# Altium PCB MDBU020.PcbDoc (part 2 of 2)
Units mil, origin at the board's own origin, x right, y up, seen from the top; angles counter-clockwise.
Board outline 2200 x 2400 mil, 4 copper layers (Top Layer, Signal Layer 1, Signal Layer 2, Bottom Layer), stack 62.8 mil thick; 105 components, 60 nets, 366 pads, 286 vias.
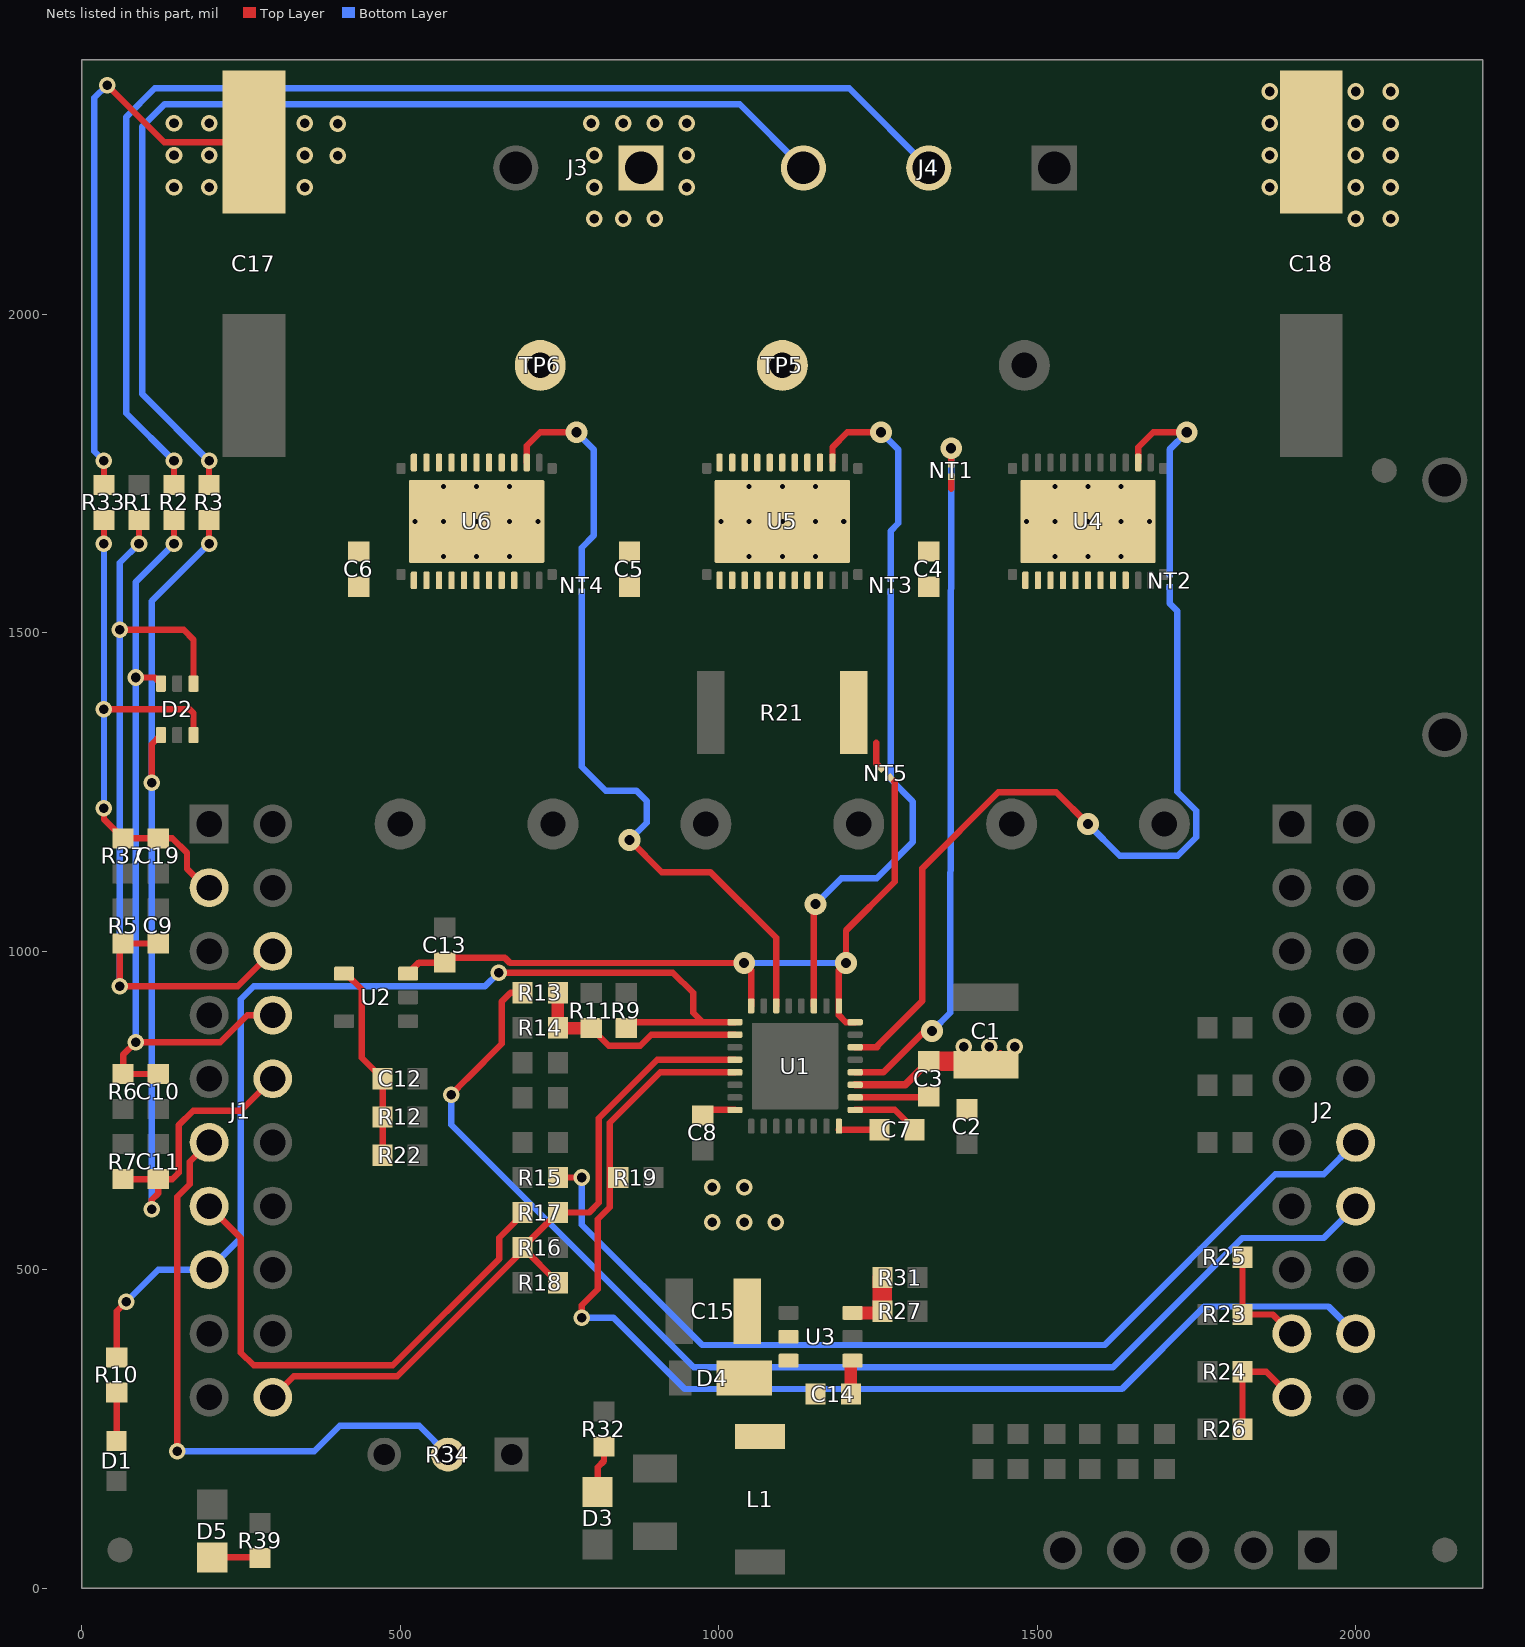
[diagram p4: the nets of this part, all layers, seen from the top]

## Via types
v1: diameter 26, hole 15, Top Layer to Bottom Layer, tented both sides, 231 vias
v2: diameter 19.68, hole 7.87, Top Layer to Bottom Layer, 38 vias
v3: diameter 34, hole 16, Top Layer to Bottom Layer, tented both sides, 17 vias

## Nets (pads, with @x,y where several pads share a name; then routed paths per layer and width w, separated by ;. In a path a pad name is that pad's centre, name@x,y a point inside that pad or via, vN(x,y) a via of type N, cw(c..) or ccw(c..) an arc to the next point about the centre after c; other vN are vias at no path point) (continued)
MOTB: J4.2 R2.2 TP5.1 U5.3 U5.4 U5.5 U5.6 U5.7 U5.8 U5.9 U5.10 U5.11 | length 1938.9
  Top Layer w10: R2.2@145,1732.56 v1(145,1770)
  Bottom Layer w10: v1(145,1770) 70,1845 70,2310 115,2355 1205,2355 J4.2@1330,2230
MOTC: J4.3 R3.2 TP6.1 U6.3 U6.4 U6.5 U6.6 U6.7 U6.8 U6.9 U6.10 U6.11 | length 1700
  Top Layer w10: R3.2@200,1732.56 v1(200,1770)
  Bottom Layer w10: v1(200,1770) 95,1875 95,2295 130,2330 1033.15,2330 J4.3@1133.15,2230
NetC3_2: C3.2 U1.2 | length 118
  Top Layer w10: U1.2@1214.49,770.79 C3.2@1332.44,770.79
NetC7_1: C7.1 U1.1 | length 106
  Top Layer w10: U1.1@1214.49,751.1 1276.46,751.1 C7.1@1307.56,720
NetC7_2: C7.2 U1.32 | length 63.5
  Top Layer w10: U1.32@1188.9,720 C7.2@1252.44,720
NetC8_1: C8.1 U1.24 | length 42
  Top Layer w10: C8.1@983.54,751.1 U1.24@1025.51,751.1
NetC12_2: C12.2 R12.2 R22.2 U2.4 | length 312
  Top Layer w10: U2.4@412,965.2 414.8,965.2 439.65,940.35 439.65,905.15 439.75,905.05 439.75,875.64 439.65,875.54 439.65,832.79 C12.2@472.44,800 R12.2@472.44,740 R22.2@472.44,680
NetC14_1: C14.1 U3.1 | length 50
  Top Layer w20: C14.1@1207.56,305 U3.1@1207.56,354.96
NetC14_2: C14.2 D4.1 L1.1 U3.6 | length 17.8
  Top Layer w10: L1.1@1065,245 L1.1@1077.56,232.44
NetD1_1: D1.1 R10.2 | length 75.9
  Top Layer w10: D1.1@55,231.5 R10.2@55,307.44
NetD3_2: D3.2 R32.2 | length 75.2
  Top Layer w10: D3.2@810,151.34 810,190 820,200 R32.2@820,222.44
NetD5_2: D5.2 R39.2 | length 75.5
  Top Layer w10: D5.2@205,48.66 278.78,48.66 R39.2@280,47.44
NetJ2_17: J2.17 R23.1 R25.2 | length 179.9
  Top Layer w10: R25.2@1822.56,520 R23.1@1822.56,430 1870,430 J2.17@1900,400
NetJ2_19: J2.19 R24.1 R26.2 | length 184
  Top Layer w10: R26.2@1822.56,250 R24.1@1822.56,340 1860,340 J2.19@1900,300
NetNT2_1: NT2.1 U4.2 | length 344.1
  Top Layer w10: U4.2@1658.74,1767.52 1658.74,1791.53 1682.21,1815 v3(1735,1815)
  Bottom Layer w10: NT2.1@1708,1592.09 1708,1788 v3(1735,1815)
NetNT3_1: NT3.1 U5.2 | length 356.1
  Top Layer w10: U5.2@1178.74,1767.52 1178.74,1791.53 1202.21,1815 v3(1255,1815)
  Bottom Layer w10: v3(1255,1815) 1282,1788 1282,1672.03 1270,1660.03 NT3.1@1270,1585
NetNT4_1: NT4.1 U6.2 | length 356.3
  Top Layer w10: U6.2@698.74,1767.52 698.74,1793.68 720.06,1815 v3(777,1815)
  Bottom Layer w10: v3(777,1815) 804,1788 804,1652.95 785,1633.95 785,1591
NetR11_1: R11.1 R13.1 R14.1 U1.18 | length 351.9
  Top Layer w10: R14.1@747.56,880 R14.1@748.12,879.44 ; R11.1@800,879.44 827.75,851.69 876.7,851.69 894.22,869.21 U1.18@1025.51,869.21
  Top Layer w20: R14.1@747.56,880 R13.1@747.56,935 ; R14.1@748.12,879.44 R11.1@800,879.44
NetR27_1: R27.1 R31.2 U3.3 | length 92.3
  Top Layer w10: R27.1@1244.84,432.4 R27.1@1247.44,435
  Top Layer w20: U3.3@1210.2,432.4 R27.1@1244.84,432.4
  Top Layer w30: R27.1@1256.95,434 R31.2@1256.95,488
NFAULT: J1.15 R9.1 R10.1 U1.17 | length 1643.9
  Top Layer w10: R10.1@55,362.56 55,435 v1(70,450) ; v1(655,966.73) 928.27,966.73 960,935 960,903.9 975,888.9 ; R9.1@864.46,888.9 975,888.9 ; U1.17@1025.51,888.9 975,888.9
  Bottom Layer w10: v1(70,450) 120,500 J1.15@200,500 250,550 250,925 270,945 633.27,945 v1(655,966.73)
NSCS/GAIN: J2.18 R19.2 U1.21 | length 1886.1
  Top Layer w10: v1(785,425) 785,444.64 810,469.64 810,579.31 829.02,598.33 829.02,730.94 908.24,810.16 U1.21@1025.51,810.16
  Bottom Layer w10: v1(785,425) 834.88,425 946.88,313 1633.21,313 1762.72,442.51 1957.49,442.51 J2.18@2000,400
POT: J1.11 R34.2 | length 965.9
  Top Layer w10: v1(150,215) 150,615 169.5,634.5 169.5,669.5 J1.11@200,700
  Bottom Layer w10: v1(150,215) 365,215 405,255 530,255 R34.2@575,210
SCLK: J1.13 R17.2 | length 822
  Top Layer w10: J1.13@200,600 250,550 250,370 270,350 488.52,350 655.54,517.02 655.54,550.54 692.44,587.44 R17.2@692.44,590
SDI: J2.12 R15.2 | length 1536.4
  Top Layer w10: R15.2@747.56,645 v1(785,645)
  Bottom Layer w10: v1(785,645) 785,571.05 974.05,382 1606.04,382 1874.04,650 1950,650 J2.12@2000,700
SDO: J2.14 R13.2 | length 1948.6
  Top Layer w10: v1(580,775) 580,775.36 604.64,800 605,800 659.78,854.78 659.78,921.41 673.38,935 R13.2@692.44,935 R13.2@692.44,934.02
  Bottom Layer w10: v1(580,775) 580,727.97 960.97,347 1619.12,347 1822.12,550 1950,550 J2.14@2000,600
SHA: NT2.2 U1.6 | length 1288.2
  Top Layer w10: U1.6@1214.49,849.53 1248.85,849.53 1248.85,851.52 1320,922.67 1320,1130.71 1439.29,1250 1530,1250 v3(1580,1200)
  Bottom Layer w10: v3(1580,1200) 1630,1150 1720.71,1150 1750,1179.29 1750,1220.71 1720,1250.71 1720,1534.47 1708,1546.47 NT2.2@1708,1572.09
SHB: NT3.2 U1.11 | length 758
  Top Layer w10: U1.11@1149.53,914.49 v3@1149.53,1071.53
  Bottom Layer w10: v3(1152.18,1074.18) 1192.82,1114.82 1248.1,1114.82 1305,1171.72 1305,1235.21 1270,1270.21 NT3.2@1270,1565
SHC: NT4.2 U1.14 | length 866.6
  Top Layer w10: v3(860,1175) 910.61,1124.39 987.32,1124.39 1090.47,1021.24 U1.14@1090.47,914.49
  Bottom Layer w10: 785,1559 785,1290 823,1252 871.18,1252 887,1236.18 887,1202 v3(860,1175)
SL: C13.1 NT5.2 U1.8 U1.9 U1.16 U2.3 | length 1213.4
  Top Layer w10: U2.3@512.4,965.2 529.64,982.44 C13.1@570,982.44 570,989.73 664.53,989.73 672.53,981.73 v3(1040,981.73) 1051.1,970.63 U1.16@1051.1,914.49 ; U1.8@1214.49,888.9 1199.88,888.9 1188.9,899.88 U1.9@1188.9,914.49 1188.9,970.63 v3(1200,981.73) 1200,1032.79 1276.39,1109.18 1276.39,1266.11 1273.81,1268.69
  Bottom Layer w10: v3(1040,981.73) v3(1200,981.73)
SP: C4.2 C5.2 C6.2 NT5.1 R21.2 U4.12 U4.13 U4.14 U4.15 U4.16 U4.17 U4.18 U4.19 U4.20 U5.12 U5.13 U5.14 U5.15 U5.16 U5.17 U5.18 U5.19 U5.20 U6.12 U6.13 U6.14 U6.15 U6.16 U6.17 U6.18 U6.19 U6.20 | length 43.7
  Top Layer w10: 1247.5,1327.5 1247.5,1295 NT5.1@1255.43,1287.07
VDRAIN: NT1.1 U1.4 | length 1099.3
  Top Layer w10: U1.4@1214.49,810.16 1258.98,810.16 1323.82,875 v3(1335,875) ; NT1.1@1365,1765 v3(1365,1790)
  Bottom Layer w10: v3(1335,875) 1363.81,903.81 v3(1365,1790)
VDS: J1.20 R16.1 R17.1 R18.2 U1.20 | length 1098.4
  Top Layer w10: J1.20@300,300 333,333 495.56,333 R16.1@692.44,529.88 ; R18.2@747.56,480 747.44,480 R16.1@692.44,535 692.56,535 R17.1@747.56,590 796.65,590 812.02,605.37 812.02,737.98 903.88,829.84 U1.20@1025.51,829.84
VM: C1.1 C2.1 C3.1 C4.1 C5.1 C6.1 C15.1 C17.1 C18.1 J3.1 NT1.2 R33.2 U1.3 U3.5 U4.27 U5.27 U6.27 | length 1146.9
  Top Layer w10: R33.2@35,1732.56 v1(35,1770) ; v1(40,2360) 129.54,2270.46 C17.1@270.49,2270.46 ; 1365,1726.19 NT1.2@1365,1745 ; C1.1@1440,837.56 C1.1@1442.44,840
  Top Layer w12: U1.3@1214.49,790.47 1292.91,790.47 C3.1@1330,827.56
  Top Layer w30: C3.1@1330,827.56 C1.1@1414.29,827.56
  Bottom Layer w10: v1(35,1770) 20,1785 20,2340 v1(40,2360)
  other v1: 990,575 1040,575 1090,575 990,630 1040,630 1385,850 1425,850 1465,850 805,2150 850,2150 900,2150 2000,2150 2055,2150 145,2200 200,2200 350,2200 805,2200 950,2200 1865,2200 2000,2200 2055,2200 402.2,2249.26 145,2250 200,2250 350,2250 805,2250 950,2250 1865,2250 2000,2250 2055,2250 402.2,2299.26 145,2300 200,2300 350,2300 800,2300 850,2300 900,2300 950,2300 1865,2300 2000,2300 2055,2300 1865,2350 2000,2350 2055,2350
  other v2: 568.03,1619.88 620,1619.88 671.97,1619.88 1048.03,1619.88 1100,1619.88 1151.97,1619.88 1528.03,1619.88 1580,1619.88 1631.97,1619.88 523.54,1675 568.03,1675 620,1675 671.97,1675 716.46,1675 1003.54,1675 1048.03,1675 1100,1675 1151.97,1675 1196.46,1675 1483.54,1675 1528.03,1675 1580,1675 1631.97,1675 1676.46,1675 568.03,1730.12 620,1730.12 671.97,1730.12 1048.03,1730.12 1100,1730.12 1151.97,1730.12 1528.03,1730.12 1580,1730.12 1631.97,1730.12
VSENA: C9.1 D2.1 J1.6 R1.1 R5.2 | length 1335.8
  Top Layer w10: v1(60,1505) 160,1505 175.59,1489.41 D2.1@175.59,1420.35 ; v1(90,1640) R1.1@90,1677.44 ; C9.1@127.44,1012.44 R5.2@65,1012.44 62.44,1015 60,1012.56 v1(60,945) 245,945 J1.6@300,1000
  Bottom Layer w10: v1(60,945) v1(60,1505) 60,1610 v1(90,1640)
VSENB: C10.1 D2.3 J1.8 R2.1 R6.2 | length 1234
  Top Layer w10: v1(85,1430) 114.76,1430 D2.3@124.41,1420.35 ; C10.1@120,807.56 R6.2@65,807.56 65,837.49 v1(85,857.49) 217.61,857.49 260.12,900 J1.8@300,900 ; v1(145,1640) R2.1@145,1677.44
  Bottom Layer w10: v1(85,857.49) v1(85,1430) 85,1580 v1(145,1640)
VSENC: C11.1 D2.4 J1.10 R3.1 R7.2 | length 1599.8
  Top Layer w10: R7.2@65,642.44 C11.1@120,642.44 ; v1(110,595) 110,610 120,620 C11.1@120,642.44 ; v1@112.6,1267.6 v1(110,1265) 110,1325.24 D2.4@124.41,1339.65 ; v1(200,1640) R3.1@200,1677.44 ; J1.10@300,800 250,750 175,750 152.5,727.5 152.5,652.5 142.44,642.44 C11.1@120,642.44
  Bottom Layer w10: v1(110,595) v1(110,1265) 110,1550 v1(200,1640)
VSENVM: C19.1 D2.6 J1.3 R33.1 R37.2 | length 873.5
  Top Layer w10: v1(35,1225) 35,1207.56 R37.2@65,1177.56 142.44,1177.56 165.39,1154.61 165.39,1129.73 197.56,1097.56 J1.3@200,1100 ; v1(35,1380) 169.69,1380 175.59,1374.09 D2.6@175.59,1339.65 ; v1(35,1640) R33.1@35,1677.44
  Bottom Layer w10: v1(35,1225) v1(35,1380) v1(35,1640)
pads on no net: FID1.1 FID2.1 FID3.1 J1.2 J1.5 J1.7 J1.12 J1.14 J1.17 J1.19 J2.8 J2.10 J2.20 U1. U3.4 U4. U4.21 U4.23 U4.24 U4.25 U4.26 U5. U5.21 U5.23 U5.24 U5.25 U5.26 U6. U6.21 U6.23 U6.24 U6.25 U6.26

## Polygon pours and split planes (outlines as drawn)
VM on Top Layer "Top Layer-No Net 1" (solid, pour order 0): 400,1610 1850,1610 1850,1740 400,1740
NetC14_2 on Top Layer "NetC14_2" (solid, remove dead copper, pour order 5): 1025,220 1026.5,221.5 1026.5,352.69 1157.31,352.69 1160,350 1160,220 1025,220
VM on Top Layer "Top Layer-VM" (solid, remove dead copper, pour order 7): 1485,870 1485,735 1365,735 1365,870
VM on Top Layer "Top Layer-VM" (solid, remove dead copper, pour order 9): 952.6,650 1057.49,650 1132.49,575 1132.49,375.71 953.31,375.71 953.31,443.87 953.31,582.76 952.6,583.47 952.6,697.24
MOTB on Top Layer "MOTB" (solid, pour order 2): 810,1675 1420,1675 1420,2180 1420,2380 1230,2380 1230,2200 1020,1935
MOTA on Top Layer "MOTA" (solid, pour order 3): 1435,2380 1435,2210 1435,2170 1415,2150 1415,1675 1830,1675 1830,2380
MOTC on Top Layer "MOTC" (solid, pour order 1): 400,1675 820.39,1675 1215,2180 1215,2380 1020,2380 1020,2215 905,2100 530,2100 400,2000
VM on Top Layer "VM_TOP" (solid, pour order 4): 20,2380 1000,2380 1000,2225 895,2120 790,2120 790,2260 735,2315 640,2315 480,2315 320,2155 20,2155
GND on Top Layer "GND_TOP" (solid, pour order 12): 770,2250 770,2120 635,2120 520,2120 445,2045 410,2010 410,1890 410,1795 210,1795 20,1795 20,2135 335,2135 495,2295 725,2295
VM on Top Layer "VM_TOP2" (solid, pour order 8): 1850,2380 2180,2380 2180,2180 2180,2090 1850,2090
GND on Top Layer "GND_TOP2" (solid, pour order 11): 1850,2070 2180,2070 2180,1900 2180,1700 1850,1700
3.3V on Top Layer "Top Layer-VM" (solid, remove dead copper, pour order 10): 1251.69,443.97 1252.4,444.68 1309.34,444.68 1431.58,444.68 1431.58,322.44 1431.58,100 1585,100 1585,15 785,15 785,135 1251.63,135 1252.4,330.2 1251.69,330.91 1251.69,444.68
SP on Top Layer "SP_TOP" (solid, pour order 6): 400,1420 800,1420 900,1456.71 1095,1456.71 1095,1309.06 1250,1309.06 1390,1309.06 1640,1482.95 1850.44,1482.95 1850.44,1612.95 400,1612.95
GND on Top Layer "Top Layer-No Net" (solid, remove dead copper, pour order 18): 0,0 2200,0 2200,2400 0,2400 0,0
VM on Bottom Layer "BOTTOM_VM" (solid, remove dead copper, pour order 15): 0,2400 2200,2400 2200,1475 0,1475
GND on Bottom Layer "Bottom Layer-GND" (solid, remove dead copper, pour order 17): 5.32,2400.26 2205.32,2400.26 2205.32,0.26 5.32,0.26 5.32,2400.26
3.3V on Signal Layer 2 "3.3V_PLANE" (solid, remove dead copper, pour order 16): 5,1290 910,1290 910,500 1310,500 1425,610 1605,790 1605,1290 2205,1290 2205,5 5,5
VM on Signal Layer 2 "VM_PLANE" (solid, remove dead copper, pour order 14): 0,2400 2200,2400 2200,1300 1590,1300 1590,800 1427,637 1305,515 910,515 910,1300 0,1300
GND on Signal Layer 1 "GND_PLANE" (solid, remove dead copper, pour order 13): -2.82,2396.23 2197.18,2396.23 2197.18,-3.77 -2.82,-3.77

## Keep-outs
Keep-Out Layer:
  lines w10: 0,0 2200,0 ; 0,0 0,2400 ; 0,0 2200,0 ; 0,0 0,2400 ; 0,2400 2200,2400 ; 0,2400 2200,2400 ; 2200,0 2200,2400 ; 2200,0 2200,2400
  text ".Layer_Name" at 577,-858.49 h60

## Other copper
Top Layer:
  text ".Layer_Name" at 577,-858.49 h60
Bottom Layer:
  rectangle net GND: 182.48,1829 375,2042.52
  rectangle net GND: 1770,1435 2179.61,2025
  rectangle net GND: 530.33,2121.76 772.62,2308.47
  text ".Layer_Name" at 577,-858.49 h60

## Silkscreen, mask and mechanical layers (free items; w line width, h text height)
Top Overlay:
  lines w10: 340,1800 340,1285 340,1280 440,1280 2085,1280 2085,1715 ; 940,655 1545,655 1545,975 940,975 940,655
  text "GND-" at 565,1975 h70
  text "VM+" at 865,1975 h70
  text "C" at 1135,1975 h70
  text "B" at 1325,1975 h70
  text "A" at 1520,1975 h70
  text "MOTC" at 790,1880 h50
  text "MOTB" at 1175,1880 h50
  text "MOTA" at 1530,1850 h50
  text "GND" at 2160.67,1475 h70 r90
  text "Hot Surface" at 895,1465 h80
  text "GHC" at 430,1085 h70
  text "GLC" at 685,1085 h70
  text "GHB" at 915,1085 h70
  text "GLB" at 1160,1085 h70
  text "GHA" at 1400,1085 h70
  text "GLA" at 1642.28,1085 h70
  text "DRV8320X" at 935,990 h70
  text "'.PRJ_Number' .PCB_Rev" at 2170,875 h65 r90
  text "STATUS" at 155,170 h50
  text "BOOSTXL-DRV8320XEVM" at 2170,140 h65 r90
  text "+" at 1525,120 h60
  text "A" at 1625,120 h65
  text "B" at 1725,120 h65
  text "C" at 1825,120 h65
  text "-" at 1925,120 h60
  text "FLT" at 25,110 h50
  text "HALL" at 1325,40 h60
  text ".Layer_Name" at 577,-858.49 h60
Bottom Overlay:
  drawing of 3493 lines, arcs and shapes, not listed
  text ".Layer_Name" at 577,-858.49 h60
Top Paste:
  text ".Layer_Name" at 577,-858.49 h60
Bottom Paste:
  text ".Layer_Name" at 577,-858.49 h60
Top Solder:
  text ".Layer_Name" at 577,-858.49 h60
  text ".Layer_Name" at 577,-858.49 h60
Bottom Solder:
  text ".Layer_Name" at 577,-858.49 h60
Drill Guide:
  text ".Layer_Name" at 577,-858.49 h60
M1 Board Outline:
  the board outline again, w10
  text ".Layer_Name" at 577,-858.49 h60
M2 Board Dimensions:
  rectangle: 125,-400 500,-275
  rectangle: 0,-275 125,-150
  lines w7: 0,-275 1000,-275 ; 125,-400 125,-150 ; 250,-400 250,-150 ; 500,-400 500,-150 ; 750,-400 750,-150 ; 0,-400 0,-150 1000,-150 1000,-400 0,-400
  text ".Layer_Name" at 577,-858.49 h60
M3 3D STEP Top:
  text ".Layer_Name" at 577,-858.49 h60
M4 3D STEP Bottom:
  text ".Layer_Name" at 577,-858.49 h60
M5 Assembly Top:
  lines w10: -292,-930.17 6308,-930.17 ; -292,-726.83 6310,-726.83 ; -292,-523.5 -292,-1133.5 3713,-1133.5 6310,-1133.5 6310,-523.5 -291.5,-523.5 -291.5,-1133.5 1284,-1133.5 ; 2173,-1133.5 2173,-523.5 ; 3440,-726.83 3440,-523.5 ; 4280,-726.83 4280,-523.5 ; 4902,-1140 4902,-937.17
  text "COMPONENTS MARKED 'DNP' SHOULD NOT BE POPULATED." at 1153.5,-318.5 h60
  text "ASSEMBLY VARIANT:" at 1153,-434 h60
  text ".VariantName" at 2189,-434 h60
  text "PCB VIEWED FROM TOP SIDE" at -228.5,-655.67 h60
  text "BOARD #:" at 2248,-655.67 h60
  text ".PRJ_Number" at 2793.5,-655.67 h60
  text "REV:" at 3638,-655.67 h60
  text ".PCB_Rev" at 3929.5,-655.67 h60
  text "SVN REV:" at 4476,-655.67 h60
  text ".VersionControl_RevNumber" at 4982,-655.67 h60
  text "TID #:" at 2248,-859 h60
  text ".TID" at 2793.5,-859 h60
  text "PLOT NAME =" at -228.5,-1064.34 h60
  text ".plot_File_Name" at 577,-1064.34 h60
  text "GENERATED    :" at 2250,-1064.34 h60
  text ".Print_Date" at 3119.5,-1064.34 h60
  text ".Print_Time" at 3848.5,-1064.34 h60
  text "TEXAS INSTRUMENTS" at 5113,-1064.34 h60
M6 Assembly Bottom:
  lines w10: -292.5,-727.33 6309.5,-727.33 ; -290.5,-930.67 6309.5,-930.67 ; 1115.5,-1140.5 1115.5,-937.67 ; 1737.5,-727.33 1737.5,-524 ; 2577.5,-727.33 2577.5,-524 ; 3844.5,-1134 3844.5,-524 ; 4733.5,-1134 6309,-1134 6309,-524 -292.5,-524 -292.5,-1134 2304.5,-1134 6309.5,-1134 6309.5,-524
  text "COMPONENTS MARKED 'DNP' SHOULD NOT BE POPULATED." at 6102,-318 h60
  text ".VariantName" at 5058,-434 h60
  text "ASSEMBLY VARIANT:" at 6097,-434 h60
  text ".VersionControl_RevNumber" at 1035.5,-656.17 h60
  text "SVN REV:" at 1541.5,-656.17 h60
  text ".PCB_Rev" at 2088,-656.17 h60
  text "REV:" at 2379.5,-656.17 h60
  text ".PRJ_Number" at 3224,-656.17 h60
  text "BOARD #:" at 3769.5,-656.17 h60
  text "PCB VIEWED FROM BOTTOM SIDE" at 6246,-656.17 h60
  text ".TID" at 3224,-859.5 h60
  text "TID #:" at 3769.5,-859.5 h60
  text "TEXAS INSTRUMENTS" at 904.5,-1064.84 h60
  text ".Print_Time" at 2169,-1064.84 h60
  text ".Print_Date" at 2898,-1064.84 h60
  text "GENERATED    :" at 3767.5,-1064.84 h60
  text ".plot_File_Name" at 5440.5,-1064.84 h60
  text "PLOT NAME =" at 6246,-1064.84 h60
M9 Title Sheet:
  drawing of 57 lines, arcs and shapes, not listed
  text "1" at 739.84,8036.5 h70
  text "2" at 3235.5,8036.5 h70
  text "3" at 5724.84,8036.5 h70
  text "4" at 8231.51,8036.5 h70
  text "5" at 10730.5,8036.5 h70
  text "6" at 13235.5,8036.5 h70
  text "A" at -416.5,6893.5 h70
  text "A" at 14383.5,6893.5 h70
  text "B" at -416.5,4513.5 h70
  text "B" at 14383.5,4513.5 h70
  text "C" at -416.5,2138.5 h70
  text "C" at 14383.5,2138.5 h70
  text "PROJECT TITLE:" at 11343.5,277.5 h45
  text ".PRJ_Title" at 11393.5,144.17 h70
  text "DESIGNED FOR:" at 11343.5,-23.5 h45
  text ".PRJ_Customer" at 11393.5,-163.5 h70
  text "D" at -416.5,-231.5 h70
  text "D" at 14383.5,-231.5 h70
  text "FILE NAME:" at 11343.5,-323.5 h45
  text ".PCB_File_Name_No_Path" at 11393.5,-443.5 h70
  text "Texas Instruments (TI) and/or its licensors do not warrant the accuracy or completeness of this specification" at 6374,-605.34 h45
  text "ENGINEER:" at 11343.5,-613.5 h45
  text "LAYOUT BY:" at 12848.5,-613.5 h45
  text "or any information contained therein. TI and/or its licensors do not warrant that this design will meet" at 6329.01,-718 h45
  text ".PRJ_Engineer" at 11393.5,-768.49 h70
  text ".PCB_Layout" at 12899,-768.49 h70
  text "the specifications, will be suitable for your application or fit for any particular purpose, or will operate in" at 6329.01,-830.67 h45
  text ".Layer_Name" at 577,-858.49 h60
  text "ALTIUM DESIGNER VERSION:" at 12848.5,-923.5 h45
  text "an implementation. TI and/or its licensors do not warrant that the design is production worthy. You should" at 6329.01,-943.33 h45
  text "completely validate and test your design implementation to confirm the system functionality for your application." at 6374,-1056 h45
  text ".print_Scale" at 11393.5,-1056.83 h70
  text ".Application_BuildNumber" at 12899,-1056.83 h70
  text "1" at 739.84,-1263.5 h70
  text "2" at 3235.5,-1263.5 h70
  text "3" at 5724.84,-1263.5 h70
  text "4" at 8231.51,-1263.5 h70
  text "5" at 10730.5,-1263.5 h70
  text "6" at 13235.5,-1263.5 h70
M10 Fab Notes:
  drawing of 173 lines, arcs and shapes, not listed
  text "DESIGN INFORMATION" at 12378.02,6201 h60
  text "MIN. TRACK WIDTH:" at 11733.46,6021 h60
  text "8" at 12829.7,6021 h60
  text "MIL" at 12984.46,6021 h60
  text "MIN. CLEARANCE:" at 11733.46,5889 h60
  text "0.2" at 12769.7,5889 h60
  text "mm" at 12984.46,5889 h60
  text "MIN. VIA PAD SIZE:" at 11733.46,5757 h60
  text "24" at 12799.71,5757 h60
  text "MIL" at 12984.46,5757 h60
  text "0.05mm (2MIL)" at 12428.46,5615.29 h60
  text "MINIMUM ANNULAR RING" at 11404.23,5611 h60
  text "EXTERNAL" at 13136.46,5611 h60
  text "PER" at 11604.23,5493 h60
  text "IPC-D-275 CLASS 2 LEVEL C" at 11824.23,5493 h60
  text "MIL, HOLES" at 13312.46,5380.71 h60
  text "+/-" at 12920,5380 h60
  text "+/-" at 13774,5380 h60
  text "REGISTRATION TOLERANCES:" at 11404.23,5375 h60
  text "METAL" at 12604,5375 h60
  text "5" at 13180.2,5375 h60
  text "3" at 14013.2,5375 h60
  text "MIL" at 14129.46,5375 h60
  text "+/-" at 13774,5262 h60
  text "HOLE SIZE TOLERANCE (UNLESS OTHERWISE SPECIFIED):" at 11404.23,5257 h60
  text "3" at 14013.2,5257 h60
  text "MIL" at 14129.46,5257 h60
  text "MATERIAL:" at 11329.46,5047.54 h60
  text "FR-4 High Tg" at 12315.9,4907.21 h60
  text "FR-408" at 11750.46,4898.64 h60
  text "OTHER" at 13238.46,4898.64 h60
  text "X" at 12161,4895 h60
  text "62 MIL (1.6mm) +/-10%" at 12070.56,4735.92 h60
  text "THICKNESS:" at 11404.23,4731.64 h60
  text "X" at 11942.4,4731.64 h60
  text "OTHER" at 13355.46,4731.64 h60
  text "TOLERANCE:" at 11404.23,4573.64 h60
  text "X" at 12243.53,4573.64 h60
  text "ANSI IPC-6012 TYPE 3 CLASS 2" at 12430.48,4573.64 h60
  text "OTHER +/-" at 12430.46,4417.64 h60
  text "BOW & TWIST:" at 11404.23,4260.64 h60
  text "X" at 12243.53,4260.64 h60
  text "ANSI IPC-6012 TYPE 3 CLASS 2" at 12430.48,4260.64 h60
  text "OTHER +/-" at 12430.46,4102.13 h60
  text "DRILLING:" at 11329.46,3963.64 h60
  text "REFERENCE:" at 11404.23,3846.64 h60
  text "X" at 12052.46,3846.64 h60
  text "AS SHOWN" at 12239.46,3846.64 h60
  text "X" at 12953.46,3846.64 h60
  text "NC_DRILL FILES" at 13090.46,3846.64 h60
  text "PTH COPPER THICKNESS:" at 11404.23,3688.64 h60
  text "X" at 12534.46,3688.64 h60
  text "20-30 um" at 12671.46,3688.64 h60
  text "OTHER" at 13388.46,3688.64 h60
  text "BOARD FINISH:" at 11329.46,3529.64 h60
  text "SILKSCREEN:" at 11484.68,3411.64 h60
  text "X" at 12433.46,3411.64 h60
  text "TOP" at 12559.46,3411.64 h60
  text "X" at 12943.46,3411.64 h60
  text "BOTTOM" at 13070.46,3411.64 h60
  text "SILKSCREEN COLOR:" at 11484.68,3244.64 h60
  text "X" at 12432.42,3244.64 h60
  text "WHITE" at 12559.46,3244.64 h60
  text "OTHER" at 13070.46,3244.64 h60
  text "X" at 13150,3090 h60
  text "GREEN" at 12690.46,3085.44 h60
  text "OTHER" at 13308.46,3085.44 h60
  text "RED" at 13662,3082 h60
  text "SOLDER RESIST COLOR:" at 11484.68,3074.64 h60
  text "X" at 12563.42,2915.44 h60
  text "MATTE" at 12690.46,2915.44 h60
  text "SEMI-GLOSS" at 13308,2914.8 h60
  text "IMMERSION GOLD (ENIG)" at 12390.46,2726.92 h60
  text "ENEPIG" at 13728,2723.64 h60
  text "SURFACE FINISH:" at 11329.46,2722.64 h60
  text "X" at 12203.51,2722.64 h60
  text "IMM. TIN/SILVER OR EQUIV" at 11659,2565.64 h60
  text "OTHER" at 13090.46,2565.64 h60
  text "ARRAY/PANEL:" at 11329.46,2386.64 h60
  text "CUT AND TRIM PER M1 BOARD OUTLINE" at 12390.46,2382.35 h60
  text "N.C. ROUTE" at 12390.46,2230.64 h60
  text "X" at 13069.46,2230.64 h60
  text "V. SCORE" at 13256.46,2230.64 h60
  text "CERTIFICATION:" at 11329.46,2093.64 h60
  text "MATERIALS AND WORKMANSHIP FOR ALL PCBS" at 12054.46,2093.64 h60
  text "TO MEET OR EXCEED THE REQUIREMENTS OF:" at 12054.46,1995.64 h60
  text "X" at 11680.96,1859.13 h60
  text "ANSI IPC-A-600F CLASS ->" at 11819.96,1859.13 h60
  text "X" at 13459.02,1859.13 h60
  text "2" at 13577.96,1859.14 h60
  text "1" at 13262.96,1857.64 h60
  text "3" at 13931.96,1857.64 h60
  text "X" at 12495.02,1699.64 h60
  text "RoHS" at 12631.96,1699.64 h60
  text "OTHER" at 13276.36,1699.64 h60
  text "PER ORDER" at 13673.42,1699.64 h60
  text "ALL BOARDS MUST MEET OR EXCEED UL94-V0 REQUIREMENTS." at 11357,1534 h60
  text "PCB MUST BEAR THE UL94V-0 UL REGISTERED MATERIAL ID NUMBER" at 11357,1414 h60
  text "ADDITIONAL REQUIREMENTS:" at 11329.46,1240.64 h60
  text "MICROSECTION:" at 11404.23,1125.64 h60
  text "YES" at 12309.96,1125.64 h60
  text "REQUIRED" at 13171.46,969.49 h60
  text "BARE BOARD ELEC. TEST:" at 11404.23,966.64 h60
  text "NONE" at 12709.96,966.64 h60
  text "X" at 13044.46,966.64 h60
  text "PER ORDER" at 13763.46,966.64 h60
  text ".Layer_Name" at 577,-858.49 h60
M11 Gerber Information:
  lines w10: -292,-930.17 6308,-930.17 ; -292,-726.83 6310,-726.83 ; -292,-523.5 -292,-1133.5 3713,-1133.5 6310,-1133.5 6310,-523.5 -291.5,-523.5 -291.5,-1133.5 1284,-1133.5 ; 2173,-1133.5 2173,-523.5 ; 3440,-726.83 3440,-523.5 ; 4280,-726.83 4280,-523.5 ; 4902,-1140 4902,-937.17
  text "ALL ARTWORK VIEWED FROM TOP SIDE" at -228.5,-655.67 h60
  text "BOARD #:" at 2248,-655.67 h60
  text ".PRJ_Number" at 2793.5,-655.67 h60
  text "REV:" at 3638,-655.67 h60
  text ".PCB_Rev" at 3929.5,-655.67 h60
  text "SVN REV:" at 4476,-655.67 h60
  text ".VersionControl_RevNumber" at 4982,-655.67 h60
  text "LAYER NAME =" at -228.5,-858.49 h60
  text "TID #:" at 2248,-859 h60
  text ".TID" at 2793.5,-859 h60
  text "PLOT NAME =" at -228.5,-1064.34 h60
  text ".plot_File_Name" at 577,-1064.34 h60
  text "GENERATED    :" at 2250,-1064.34 h60
  text ".Print_Date" at 3119.5,-1064.34 h60
  text ".Print_Time" at 3848.5,-1064.34 h60
  text "TEXAS INSTRUMENTS" at 5113,-1064.34 h60
M12 Stackup:
  drawing of 295 lines, arcs and shapes, not listed
  text "Layer" at 9720.74,7785 h60
  text "Name" at 10130.66,7785 h60
  text "Material" at 11070.4,7785 h60
  text "Thickness" at 11930.17,7785 h60
  text "Constant" at 12580,7785 h60
  text "Board Layer Stack" at 13149.86,7785 h60
  text "1" at 9720.74,7665 h60
  text "Top Overlay" at 10130.66,7665 h60
  text "2" at 9720.74,7545 h60
  text "Top Solder" at 10130.66,7545 h60
  text "Solder Resist" at 11070.4,7545 h60
  text "0.40mil" at 11930.17,7545 h60
  text "3.5" at 12580,7545 h60
  text "3" at 9720.74,7425 h60
  text "Top Layer" at 10130.66,7425 h60
  text "Copper" at 11070.4,7425 h60
  text "2.80mil" at 11930.17,7425 h60
  text "4" at 9720.74,7305 h60
  text "Dielectric 1" at 10130.66,7305 h60
  text "FR-4" at 11070.4,7305 h60
  text "8.00mil" at 11930.17,7305 h60
  text "4.2" at 12580,7305 h60
  text "5" at 9720.74,7185 h60
  text "Signal Layer 1" at 10130.66,7185 h60
  text "Copper" at 11070.4,7185 h60
  text "1.40mil" at 11930.17,7185 h60
  text "6" at 9720.74,7065 h60
  text "Dielectric 2" at 10130.66,7065 h60
  text "FR-4" at 11070.4,7065 h60
  text "38.40mil" at 11930.17,7065 h60
  text "4.2" at 12580,7065 h60
  text "7" at 9720.74,6945 h60
  text "Signal Layer 2" at 10130.66,6945 h60
  text "Copper" at 11070.4,6945 h60
  text "1.40mil" at 11930.17,6945 h60
  text "8" at 9720.74,6825 h60
  text "Dielectric 3" at 10130.66,6825 h60
  text "FR-4" at 11070.4,6825 h60
  text "8.00mil" at 11930.17,6825 h60
  text "4.2" at 12580,6825 h60
  text "9" at 9720.74,6705 h60
  text "Bottom Layer" at 10130.66,6705 h60
  text "Copper" at 11070.4,6705 h60
  text "2.80mil" at 11930.17,6705 h60
  text "10" at 9720.74,6585 h60
  text "Bottom Solder" at 10130.66,6585 h60
  text "Solder Resist" at 11070.4,6585 h60
  text "0.40mil" at 11930.17,6585 h60
  text "3.5" at 12580,6585 h60
  text "11" at 9720.74,6465 h60
  text "Bottom Overlay" at 10130.66,6465 h60
  text ".Layer_Name" at 577,-858.49 h60
M13 Component Bodies Top:
  text ".Layer_Name" at 577,-858.49 h60
M14 Component Bodies Bottom:
  text ".Layer_Name" at 577,-858.49 h60
M15 Courtyards Top:
  text ".Layer_Name" at 577,-858.49 h60
M16 Courtyards Bottom:
  text ".Layer_Name" at 577,-858.49 h60
Drill Drawing:
  circle w10: c5363.72,3017.64 r27.63
  lines w10: 5336.09,2492.74 5391.34,2492.74 5391.34,2547.99 5336.09,2547.99 5336.09,2492.74 ; 5336.09,2617.06 5363.72,2630.87 5391.34,2617.06 5377.53,2644.68 5391.34,2672.31 5363.72,2658.5 5336.09,2672.31 5349.9,2644.68 5336.09,2617.06 ; 5336.09,2796.63 5391.34,2796.63 5363.72,2741.38 5336.09,2796.63 ; 5336.09,2879.51 5349.9,2879.51 5363.72,2865.7 5377.53,2879.51 5391.34,2879.51 5377.53,2893.32 5391.34,2907.14 5377.53,2907.14 5363.72,2920.95 5349.9,2907.14 5336.09,2907.14 5349.9,2893.32 5336.09,2879.51 ; 5336.09,3114.34 5391.34,3114.34 5391.34,3169.59 5336.09,3169.59 5336.09,3114.34 ; 5336.09,3252.47 5349.9,3252.47 5349.9,3238.66 5377.53,3238.66 5377.53,3252.47 5391.34,3252.47 5391.34,3280.1 5377.53,3280.1 5377.53,3293.91 5349.9,3293.91 5349.9,3280.1 5336.09,3280.1 5336.09,3252.47 ; 5347.14,3125.39 5380.29,3125.39 5380.29,3158.54 5347.14,3158.54 5347.14,3125.39
  lines w12: 5286,2455.44 8517.49,2455.44 ; 5286,3325.68 8517.49,3325.68 ; 5623.86,2331.12 5623.86,3450 ; 5955.86,2331.12 5955.86,3450 ; 6592.43,2331.12 6592.43,3450 ; 6851.57,2331.12 6851.57,3450 ; 7226.72,2331.12 7226.72,3450 ; 7951.05,2331.12 7951.05,3450 ; 5286,2331.12 8517.49,2331.12 8517.49,3450 5286,3450 5286,2331.12
  text "Symbol" at 5360.59,3362.98 h72
  text "Quantity" at 5661.16,3362.98 h72
  text "Finished Hole Size" at 5993.16,3362.98 h72
  text "Plated" at 6629.72,3362.98 h72
  text "Hole Type" at 6888.86,3362.98 h72
  text "Drill Layer Pair" at 7264.02,3362.98 h72
  text "Hole Tolerance" at 7988.35,3362.98 h72
  text "38" at 5661.16,3238.66 h60
  text "7.87mil (0.200mm)" at 5993.16,3238.66 h60
  text "PTH" at 6629.72,3238.66 h60
  text "Round" at 6888.86,3238.66 h60
  text "Top Layer - Bottom Layer" at 7264.02,3238.66 h60
  text "231" at 5661.16,3114.34 h60
  text "15.00mil (0.381mm)" at 5993.16,3114.34 h60
  text "PTH" at 6629.72,3114.34 h60
  text "Round" at 6888.86,3114.34 h60
  text "Top Layer - Bottom Layer" at 7264.02,3114.34 h60
  text "17" at 5661.16,2990.02 h60
  text "16.00mil (0.406mm)" at 5993.16,2990.02 h60
  text "PTH" at 6629.72,2990.02 h60
  text "Round" at 6888.86,2990.02 h60
  text "Top Layer - Bottom Layer" at 7264.02,2990.02 h60
  text "3" at 5661.16,2865.7 h60
  text "33.47mil (0.850mm)" at 5993.16,2865.7 h60
  text "PTH" at 6629.72,2865.7 h60
  text "Round" at 6888.86,2865.7 h60
  text "Top Layer - Bottom Layer" at 7264.02,2865.7 h60
  text "14" at 5661.16,2741.38 h60
  text "40.00mil (1.016mm)" at 5993.16,2741.38 h60
  text "PTH" at 6629.72,2741.38 h60
  text "Round" at 6888.86,2741.38 h60
  text "Top Layer - Bottom Layer" at 7264.02,2741.38 h60
  text "40" at 5661.16,2617.06 h60
  text "40.16mil (1.020mm)" at 5993.16,2617.06 h60
  text "PTH" at 6629.72,2617.06 h60
  text "Round" at 6888.86,2617.06 h60
  text "Top Layer - Bottom Layer" at 7264.02,2617.06 h60
  text "7" at 5661.16,2492.74 h60
  text "51.18mil (1.300mm)" at 5993.16,2492.74 h60
  text "PTH" at 6629.72,2492.74 h60
  text "Round" at 6888.86,2492.74 h60
  text "Top Layer - Bottom Layer" at 7264.02,2492.74 h60
  text "350 Total" at 5661.16,2368.42 h60
  text ".Layer_Name" at 577,-858.49 h60
Mechanical 17:
  text ".Layer_Name" at 577,-858.49 h60
Mechanical 18:
  text ".Layer_Name" at 577,-858.49 h60
Mechanical 19:
  text ".Layer_Name" at 577,-858.49 h60

## Dimensions
0,0 to 0,2400 on M2 Board Dimensions
2200,0 to 0,2400 on M2 Board Dimensions
0,-400 to 1000,-400 on M2 Board Dimensions

## Text inside footprints (layer, text, board x,y; h text height)
Logo3: Bottom Overlay "For evaluation only; not FCC approved for resale." at 1747.07,501.1 h60
"Logo 6": Bottom Overlay "RoHS Exempt" at 1270,405 h60
ZZ1: M5 Assembly Top "Install label in silkscreened box after final wash.  Text shall be 8 pt font.  Text shall be per the Label Table in the PDF schematic." at 95,2725 h40